# Altium PCB PCB.PcbDoc (part 2 of 2)
Units mil, origin at the board's own origin, x right, y up, seen from the top; angles counter-clockwise.
Board outline 1692.91 x 1181.1 mil, 2 copper layers (Top Layer, Bottom Layer); 68 components, 59 nets, 274 pads, 55 vias.
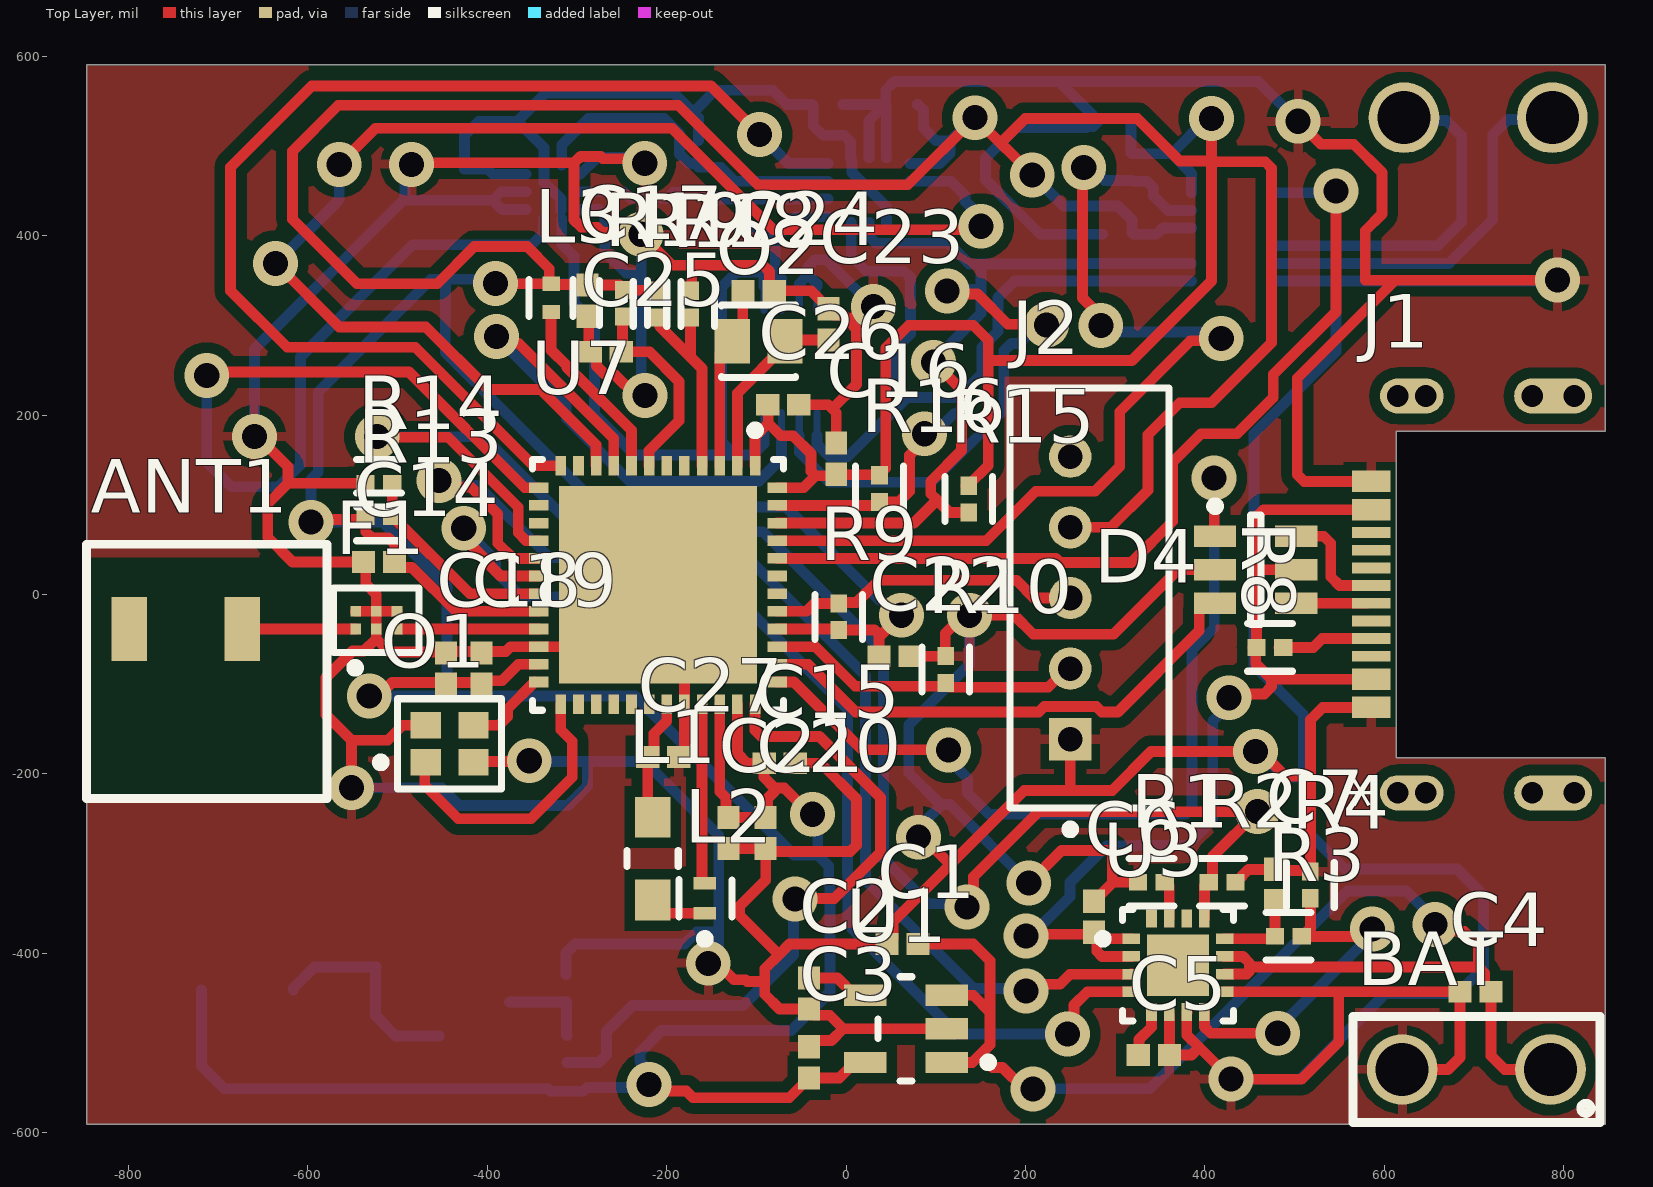
[diagram p0: Top Layer view]

## Silkscreen, mask and mechanical layers (free items; w line width, h text height) (continued)
Mechanical 1: (continued)
  lines w10: -846.46,-590.55 846.46,-590.55 ; -846.46,-590.55 846.46,-590.55 ; -846.46,-590.55 -846.46,590.55 846.46,590.55 846.46,182.09 613.19,182.09 613.19,-182.09 846.46,-182.09 846.46,-590.55

## Text inside footprints (layer, text, board x,y; h text height)
CR1: Mechanical 13 "*" at -548.62,-541.87 h50 r270; Bottom Overlay "*" at -548.62,-600.56 h50 r270
J1: Top Overlay "*" at 610.61,-238.5 h50 r90; Mechanical 13 "*" at 610.61,-238.5 h50 r90